# Altium PCB bookmarker.PcbDoc (part 2 of 3)
Units mil, origin at the board's own origin, x right, y up, seen from the top; angles counter-clockwise.
Board outline 5902.76 x 1187.28 mil, 2 copper layers (Top Layer, Bottom Layer); 9 components, 4 nets, 34 pads, 30 vias.
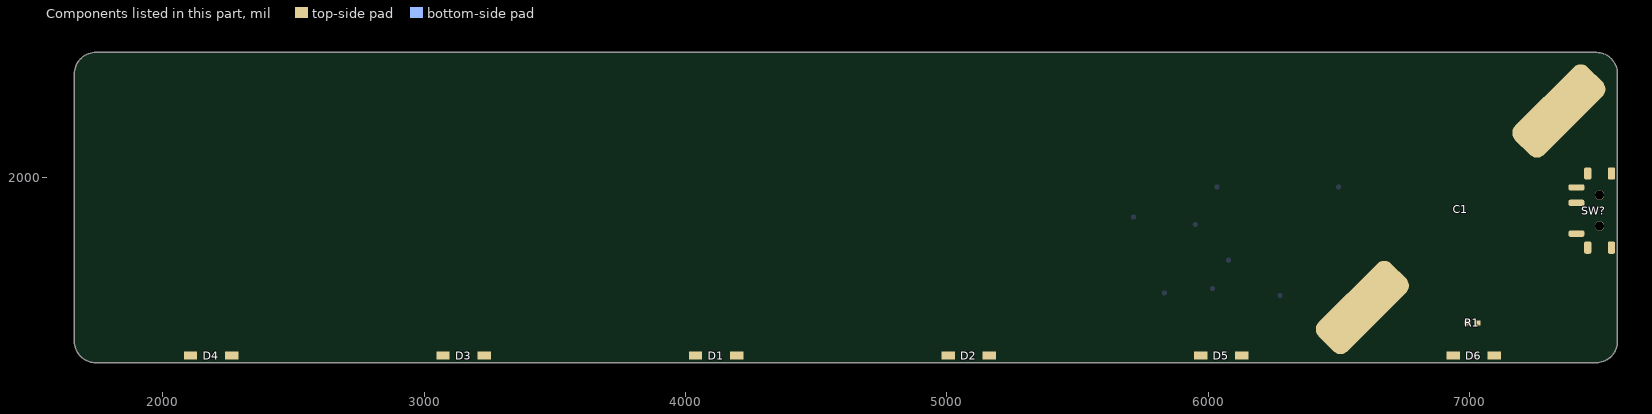
[diagram p2: the components of this part, seen from the top]

## Via types
v1: diameter 24, hole 12, Top Layer to Bottom Layer, tented both sides, 29 vias
v2: diameter 100, hole 80, Top Layer to Bottom Layer, tented both sides, 1 vias

## Nets (pads, with @x,y where several pads share a name; then routed paths per layer and width w, separated by ;. In a path a pad name is that pad's centre, name@x,y a point inside that pad or via, vN(x,y) a via of type N, cw(c..) or ccw(c..) an arc to the next point about the centre after c; other vN are vias at no path point) (continued)
copper on no net: (continued)
  Bottom Layer w5: 2121,1698 2454,1698 ; 2121,1702.5 2454,1702.5 ; 2121,1707 2454,1707 ; 2121,1711.5 2449.5,1711.5 ; 2197.5,1819.5 2238,1819.5 ; 2197.5,1824 2229,1824 ; 2197.5,1828.5 2215.5,1828.5 ; 2202,1815 2247,1815 ; 2202,1833 2206.5,1833 ; 2211,1810.5 2260.5,1810.5 ; 2220,1806 2269.5,1806 ; 2229,1801.5 2278.5,1801.5 ; 2242.5,1797 2292,1797 ; 2251.5,1792.5 2301,1792.5 ; 2260.5,1788 2310,1788 ; 2269.5,1783.5 2323.5,1783.5 ; 2283,1585.5 2301,1585.5 ; 2283,1590 2301,1590 ; 2283,1594.5 2296.5,1594.5 ; 2283,1599 2296.5,1599 ; 2283,1603.5 2296.5,1603.5 ; 2283,1608 2292,1608 ; 2283,1779 2332.5,1779 ; 2287.5,1572 2305.5,1572 ; 2287.5,1576.5 2301,1576.5 ; 2287.5,1581 2301,1581 ; 2292,1554 2310,1554 ; 2292,1558.5 2310,1558.5 ; 2292,1563 2305.5,1563 ; 2292,1567.5 2305.5,1567.5 ; 2292,1774.5 2341.5,1774.5 ; 2296.5,1536 2683.5,1536 ; 2296.5,1540.5 2683.5,1540.5 ; 2296.5,1545 2310,1545 ; 2296.5,1549.5 2310,1549.5 ; 2301,1522.5 2692.5,1522.5 ; 2301,1527 2692.5,1527 ; 2301,1531.5 2688,1531.5 ; 2305.5,1504.5 2323.5,1504.5 ; 2305.5,1509 2323.5,1509 ; 2305.5,1513.5 2319,1513.5 ; 2305.5,1518 2319,1518 ; 2305.5,1770 2355,1770 ; 2310,1491 2328,1491 ; 2310,1495.5 2323.5,1495.5 ; 2310,1500 2323.5,1500 ; 2314.5,1473 2332.5,1473 ; 2314.5,1477.5 2328,1477.5 ; 2314.5,1482 2328,1482 ; 2314.5,1486.5 2328,1486.5 ; 2314.5,1765.5 2364,1765.5 ; 2319,1459.5 2332.5,1459.5 ; 2319,1464 2332.5,1464 ; 2319,1468.5 2332.5,1468.5 ; 2323.5,1455 2332.5,1455 ; 2323.5,1585.5 2346,1585.5 ; 2323.5,1590 2346,1590 ; 2328,1581 2341.5,1581 ; 2328,1594.5 2350.5,1594.5 ; 2328,1599 2355,1599 ; 2328,1761 2373,1761 ; 2332.5,1603.5 2359.5,1603.5 ; 2337,1608 2364,1608 ; 2337,1756.5 2386.5,1756.5 ; 2341.5,1612.5 2373,1612.5 ; 2346,1617 2377.5,1617 ; 2346,1752 2395.5,1752 ; 2350.5,1621.5 2382,1621.5 ; 2355,1626 2386.5,1626 ; 2359.5,1630.5 2391,1630.5 ; 2359.5,1747.5 2404.5,1747.5 ; 2364,1635 2400,1635 ; 2368.5,1639.5 2404.5,1639.5 ; 2368.5,1743 2409,1743 ; 2377.5,1644 2409,1644 ; 2377.5,1738.5 2409,1738.5 ; 2382,1648.5 2418,1648.5 ; 2386.5,1653 2422.5,1653 ; 2391,1657.5 2431.5,1657.5 ; 2391,1734 2404.5,1734 ; 2400,1662 2440.5,1662 ; 2404.5,1666.5 2445,1666.5 ; 2413.5,1671 2454,1671 ; 2418,1675.5 2463,1675.5 ; 2427,1680 2472,1680 ; 2431.5,1684.5 2481,1684.5 ; 2440.5,1689 2490,1689 ; 2449.5,1693.5 2499,1693.5 ; 2458.5,1698 2508,1698 ; 2463,1581 2481,1581 ; 2463,1585.5 2481,1585.5 ; 2463,1590 2476.5,1590 ; 2463,1594.5 2472,1594.5 ; 2467.5,1572 2485.5,1572 ; 2467.5,1576.5 2485.5,1576.5 ; 2467.5,1702.5 2517,1702.5 ; 2472,1563 2494.5,1563 ; 2472,1567.5 2490,1567.5 ; 2476.5,1558.5 2494.5,1558.5 ; 2476.5,1707 2530.5,1707 ; 2481,1549.5 2499,1549.5 ; 2481,1554 2499,1554 ; 2485.5,1545 2503.5,1545 ; 2485.5,1711.5 2539.5,1711.5 ; 2494.5,1716 2553,1716 ; 2499,1518 2517,1518 ; 2503.5,1509 2526,1509 ; 2503.5,1513.5 2521.5,1513.5 ; 2503.5,1720.5 2584.5,1720.5 ; 2508,1504.5 2526,1504.5 ; 2508,1810.5 2530.5,1810.5 ; 2508,1815 2526,1815 ; 2508,1819.5 2526,1819.5 ; 2508,1824 2521.5,1824 ; 2512.5,1495.5 2530.5,1495.5 ; 2512.5,1500 2530.5,1500 ; 2512.5,1801.5 2535,1801.5 ; 2512.5,1806 2535,1806 ; 2517,1486.5 2539.5,1486.5 ; 2517,1491 2535,1491 ; 2517,1725 2580,1725 ; 2517,1797 2539.5,1797 ; 2521.5,1482 2539.5,1482 ; 2521.5,1788 2544,1788 ; 2521.5,1792.5 2539.5,1792.5 ; 2526,1473 2544,1473 ; 2526,1477.5 2544,1477.5 ; 2526,1729.5 2580,1729.5 ; 2526,1779 2548.5,1779 ; 2526,1783.5 2548.5,1783.5 ; 2530.5,1468.5 2544,1468.5 ; 2530.5,1774.5 2553,1774.5 ; 2535,1765.5 2557.5,1765.5 ; 2535,1770 2553,1770 ; 2539.5,1734 2575.5,1734 ; 2539.5,1756.5 2562,1756.5 ; 2539.5,1761 2557.5,1761 ; 2544,1752 2566.5,1752 ; 2548.5,1738.5 2571,1738.5 ; 2548.5,1743 2571,1743 ; 2548.5,1747.5 2566.5,1747.5 ; 2566.5,1711.5 2589,1711.5 ; 2566.5,1716 2584.5,1716 ; 2571,1702.5 2593.5,1702.5 ; 2571,1707 2589,1707 ; 2575.5,1698 2598,1698 ; 2580,1689 2602.5,1689 ; 2580,1693.5 2598,1693.5 ; 2584.5,1680 2607,1680 ; 2584.5,1684.5 2602.5,1684.5 ; 2589,1671 2611.5,1671 ; 2589,1675.5 2611.5,1675.5 ; 2589,2251.5 2607,2251.5 ; 2589,2256 2607,2256 ; 2589,2260.5 2922,2260.5 ; 2589,2265 2917.5,2265 ; 2593.5,1666.5 2616,1666.5 ; 2593.5,2242.5 2616,2242.5 ; 2593.5,2247 2611.5,2247 ; 2593.5,2269.5 2913,2269.5 ; 2593.5,2274 2913,2274 ; 2598,1657.5 2620.5,1657.5 ; 2598,1662 2616,1662 ; 2598,2233.5 2620.5,2233.5 ; 2598,2238 2616,2238 ; 2602.5,1648.5 2625,1648.5 ; 2602.5,1653 2625,1653 ; 2602.5,2224.5 2625,2224.5 ; 2602.5,2229 2625,2229 ; 2607,1644 2629.5,1644 ; 2607,2220 2629.5,2220 ; 2607,2278.5 2908.5,2278.5 ; 2611.5,1635 2634,1635 ; 2611.5,1639.5 2629.5,1639.5 ; 2611.5,1792.5 2917.5,1792.5 ; 2611.5,1797 2913,1797 ; 2611.5,1801.5 2908.5,1801.5 ; 2611.5,2211 2629.5,2211 ; 2611.5,2215.5 2629.5,2215.5 ; 2616,1626 2638.5,1626 ; 2616,1630.5 2634,1630.5 ; 2616,1788 2917.5,1788 ; 2620.5,1621.5 2638.5,1621.5 ; 2625,1612.5 2638.5,1612.5 ; 2625,1617 2638.5,1617 ; 2634,1585.5 2656.5,1585.5 ; 2634,1590 2652,1590 ; 2634,1594.5 2652,1594.5 ; 2634,1599 2647.5,1599 ; 2638.5,1576.5 2661,1576.5 ; 2638.5,1581 2656.5,1581 ; 2643,1572 2665.5,1572 ; 2643,2161.5 2665.5,2161.5 ; 2643,2166 2661,2166 ; 2643,2170.5 2661,2170.5 ; 2643,2175 2670,2175 ; 2643,2179.5 2971.5,2179.5 ; 2643,2184 2967,2184 ; 2643,2188.5 2962.5,2188.5 ; 2647.5,1563 2670,1563 ; 2647.5,1567.5 2665.5,1567.5 ; 2647.5,2152.5 2670,2152.5 ; 2647.5,2157 2665.5,2157 ; 2652,1554 2674.5,1554 ; 2652,1558.5 2670,1558.5 ; 2652,2143.5 2674.5,2143.5 ; 2652,2148 2674.5,2148 ; 2652,2193 2962.5,2193 ; 2656.5,1545 2679,1545 ; 2656.5,1549.5 2679,1549.5 ; 2656.5,1783.5 2679,1783.5 ; 2656.5,2139 2679,2139 ; 2661,1774.5 2683.5,1774.5 ; 2661,1779 2679,1779 ; 2661,2130 2679,2130 ; 2661,2134.5 2679,2134.5 ; 2665.5,1765.5 2688,1765.5 ; 2665.5,1770 2688,1770 ; 2665.5,2125.5 2679,2125.5 ; 2670,1761 2692.5,1761 ; 2674.5,1518 2697,1518 ; 2674.5,1752 2697,1752 ; 2674.5,1756.5 2692.5,1756.5 ; 2679,1509 2701.5,1509 ; 2679,1513.5 2697,1513.5 ; 2679,1743 2701.5,1743 ; 2679,1747.5 2697,1747.5 ; 2683.5,1500 2706,1500 ; 2683.5,1504.5 2701.5,1504.5 ; 2683.5,1738.5 2706,1738.5 ; 2688,1491 2710.5,1491 ; 2688,1495.5 2710.5,1495.5 ; 2688,1729.5 2710.5,1729.5 ; 2688,1734 2706,1734 ; 2692.5,1486.5 2715,1486.5 ; 2692.5,1720.5 2715,1720.5 ; 2692.5,1725 2710.5,1725 ; 2692.5,2062.5 2899.5,2062.5 ; 2692.5,2067 2895,2067 ; 2697,1477.5 2719.5,1477.5 ; 2697,1482 2715,1482 ; 2697,1711.5 2719.5,1711.5 ; 2697,1716 2719.5,1716 ; 2697,2053.5 2904,2053.5 ; 2697,2058 2904,2058 ; 2697,2071.5 2895,2071.5 ; 2701.5,1468.5 2724,1468.5 ; 2701.5,1473 2724,1473 ; 2701.5,1707 2724,1707 ; 2706,1464 2724,1464 ; 2706,1630.5 3007.5,1630.5 ; 2706,1635 3007.5,1635 ; 2706,1639.5 3007.5,1639.5 ; 2706,1644 3003,1644 ; 2706,1698 2728.5,1698 ; 2706,1702.5 2724,1702.5 ; 2706,2202 2724,2202 ; 2706,2206.5 2724,2206.5 ; 2706,2211 2728.5,2211 ; 2706,2215.5 2728.5,2215.5 ; 2710.5,1459.5 2724,1459.5 ; 2710.5,1626 3007.5,1626 ; 2710.5,1689 2733,1689 ; 2710.5,1693.5 2733,1693.5 ; 2710.5,2220 2733,2220 ; 2710.5,2224.5 2737.5,2224.5 ; 2715,1684.5 2737.5,1684.5 ; 2715,2197.5 2719.5,2197.5 ; 2715,2229 2737.5,2229 ; 2715,2233.5 2742,2233.5 ; 2719.5,1675.5 2742,1675.5 ; 2719.5,1680 2737.5,1680 ; 2719.5,2238 2742,2238 ; 2724,1666.5 2746.5,1666.5 ; 2724,1671 2742,1671 ; 2724,2242.5 2746.5,2242.5 ; 2724,2247 2746.5,2247 ; 2728.5,1662 2751,1662 ; 2728.5,2251.5 2751,2251.5 ; 2728.5,2256 2751,2256 ; 2733,1653 2755.5,1653 ; 2733,1657.5 2751,1657.5 ; 2737.5,1648.5 2755.5,1648.5 ; 2737.5,1783.5 2760,1783.5 ; 2742,1774.5 2764.5,1774.5 ; 2742,1779 2760,1779 ; 2746.5,1765.5 2769,1765.5 ; 2746.5,1770 2769,1770 ; 2751,1761 2773.5,1761 ; 2751,2116.5 2782.5,2116.5 ; 2751,2121 2769,2121 ; 2751,2125.5 2773.5,2125.5 ; 2751,2130 2773.5,2130 ; 2755.5,1752 2778,1752 ; 2755.5,1756.5 2773.5,1756.5 ; 2755.5,2112 2764.5,2112 ; 2755.5,2134.5 2778,2134.5 ; 2760,1545 2778,1545 ; 2760,1549.5 2791.5,1549.5 ; 2760,1554 2805,1554 ; 2760,1558.5 2818.5,1558.5 ; 2760,1743 2782.5,1743 ; 2760,1747.5 2778,1747.5 ; 2760,2139 2778,2139 ; 2760,2143.5 2782.5,2143.5 ; 2764.5,1738.5 2787,1738.5 ; 2764.5,2148 2782.5,2148 ; 2764.5,2152.5 2787,2152.5 ; 2769,1563 2836.5,1563 ; 2769,1729.5 2791.5,1729.5 ; 2769,1734 2787,1734 ; 2769,2103 2791.5,2103 ; 2769,2107.5 2791.5,2107.5 ; 2769,2112 2787,2112 ; 2769,2157 2791.5,2157 ; 2769,2161.5 2791.5,2161.5 ; 2773.5,1518 3084,1518 ; 2773.5,1522.5 3093,1522.5 ; 2773.5,1527 3102,1527 ; 2773.5,1720.5 2796,1720.5 ; 2773.5,1725 2791.5,1725 ; 2773.5,1936.5 2805,1936.5 ; 2773.5,1941 2827.5,1941 ; 2773.5,1945.5 2845.5,1945.5 ; 2773.5,1950 2868,1950 ; 2773.5,2098.5 2796,2098.5 ; 2773.5,2166 2796,2166 ; 2773.5,2170.5 2796,2170.5 ; 2773.5,2175 2800.5,2175 ; 2778,1513.5 3075,1513.5 ; 2778,1567.5 2859,1567.5 ; 2778,1711.5 2800.5,1711.5 ; 2778,1716 2800.5,1716 ; 2778,2089.5 2800.5,2089.5 ; 2778,2094 2796,2094 ; 2782.5,1509 3066,1509 ; 2782.5,1707 2805,1707 ; 2782.5,1954.5 2890.5,1954.5 ; 2782.5,2080.5 2805,2080.5 ; 2782.5,2085 2805,2085 ; 2782.5,2233.5 2859,2233.5 ; 2782.5,2238 2841,2238 ; 2782.5,2242.5 2818.5,2242.5 ; 2782.5,2247 2800.5,2247 ; 2787,1698 2809.5,1698 ; 2787,1702.5 2805,1702.5 ; 2787,2076 2809.5,2076 ; 2787,2229 2877,2229 ; 2791.5,1572 2886,1572 ; 2791.5,1689 2814,1689 ; 2791.5,1693.5 2814,1693.5 ; 2796,1684.5 2818.5,1684.5 ; 2800.5,1675.5 2823,1675.5 ; 2800.5,1680 2818.5,1680 ; 2805,1576.5 2931,1576.5 ; 2805,1666.5 2827.5,1666.5 ; 2805,1671 2823,1671 ; 2805,1959 2908.5,1959 ; 2805,2044.5 2827.5,2044.5 ; 2805,2049 2823,2049 ; 2809.5,1662 2832,1662 ; 2809.5,2040 2832,2040 ; 2809.5,2224.5 2886,2224.5 ; 2814,1653 2836.5,1653 ; 2814,1657.5 2832,1657.5 ; 2814,2031 2836.5,2031 ; 2814,2035.5 2832,2035.5 ; 2818.5,1648.5 2836.5,1648.5 ; 2818.5,1783.5 2841,1783.5 ; 2818.5,2022 2841,2022 ; 2818.5,2026.5 2841,2026.5 ; 2823,1581 3205.5,1581 ; 2823,1774.5 2845.5,1774.5 ; 2823,1779 2845.5,1779 ; 2823,2017.5 2845.5,2017.5 ; 2827.5,1770 2850,1770 ; 2827.5,1963.5 2931,1963.5 ; 2827.5,2008.5 2850,2008.5 ; 2827.5,2013 2845.5,2013 ; 2827.5,2220 2886,2220 ; 2832,1761 2854.5,1761 ; 2832,1765.5 2850,1765.5 ; 2832,1999.5 2850,1999.5 ; 2832,2004 2850,2004 ; 2836.5,1752 2859,1752 ; 2836.5,1756.5 2859,1756.5 ; 2836.5,1995 2850,1995 ; 2836.5,2148 2917.5,2148 ; 2836.5,2152.5 2895,2152.5 ; 2836.5,2157 2877,2157 ; 2836.5,2161.5 2859,2161.5 ; 2836.5,2166 2841,2166 ; 2841,1585.5 3205.5,1585.5 ; 2841,1747.5 2863.5,1747.5 ; 2845.5,1738.5 2868,1738.5 ; 2845.5,1743 2863.5,1743 ; 2845.5,1968 2949,1968 ; 2845.5,2143.5 2935.5,2143.5 ; 2845.5,2215.5 2886,2215.5 ; 2850,1729.5 2872.5,1729.5 ; 2850,1734 2868,1734 ; 2854.5,1725 2877,1725 ; 2854.5,2098.5 3048,2098.5 ; 2854.5,2103 3043.5,2103 ; 2854.5,2107.5 3043.5,2107.5 ; 2854.5,2112 3039,2112 ; 2859,1716 2881.5,1716 ; 2859,1720.5 2877,1720.5 ; 2859,2089.5 2881.5,2089.5 ; 2859,2094 3048,2094 ; 2863.5,1590 3205.5,1590 ; 2863.5,1707 2886,1707 ; 2863.5,1711.5 2881.5,1711.5 ; 2863.5,2085 2886,2085 ; 2863.5,2211 2886,2211 ; 2868,1698 2890.5,1698 ; 2868,1702.5 2890.5,1702.5 ; 2868,1972.5 2962.5,1972.5 ; 2868,2076 2890.5,2076 ; 2868,2080.5 2886,2080.5 ; 2868,2139 2935.5,2139 ; 2872.5,1693.5 2895,1693.5 ; 2877,1684.5 2899.5,1684.5 ; 2877,1689 2895,1689 ; 2881.5,1675.5 2904,1675.5 ; 2881.5,1680 2904,1680 ; 2886,1671 2908.5,1671 ; 2886,1977 2962.5,1977 ; 2886,2049 2908.5,2049 ; 2886,2134.5 2935.5,2134.5 ; 2890.5,1662 2913,1662 ; 2890.5,1666.5 2908.5,1666.5 ; 2890.5,2040 2913,2040 ; 2890.5,2044.5 2908.5,2044.5 ; 2895,1594.5 3205.5,1594.5 ; 2895,1653 2917.5,1653 ; 2895,1657.5 2913,1657.5 ; 2895,2031 2917.5,2031 ; 2895,2035.5 2917.5,2035.5 ; 2899.5,1648.5 2922,1648.5 ; 2899.5,1783.5 2922,1783.5 ; 2899.5,2026.5 3093,2026.5 ; 2904,1774.5 2926.5,1774.5 ; 2904,1779 2922,1779 ; 2904,2017.5 3093,2017.5 ; 2904,2022 3093,2022 ; 2904,2251.5 2926.5,2251.5 ; 2904,2256 2922,2256 ; 2908.5,1765.5 2931,1765.5 ; 2908.5,1770 2931,1770 ; 2908.5,1981.5 2962.5,1981.5 ; 2908.5,2013 3093,2013 ; 2908.5,2130 2935.5,2130 ; 2908.5,2242.5 2931,2242.5 ; 2908.5,2247 2931,2247 ; 2913,1761 2935.5,1761 ; 2913,2238 2935.5,2238 ; 2913,2287.5 2944.5,2287.5 ; 2913,2292 2940,2292 ; 2913,2296.5 2931,2296.5 ; 2917.5,1752 2940,1752 ; 2917.5,1756.5 2935.5,1756.5 ; 2917.5,2229 2940,2229 ; 2917.5,2233.5 2935.5,2233.5 ; 2917.5,2283 2953.5,2283 ; 2917.5,2301 2922,2301 ; 2922,1743 2944.5,1743 ; 2922,1747.5 2940,1747.5 ; 2922,2220 2944.5,2220 ; 2922,2224.5 2944.5,2224.5 ; 2922,2278.5 2962.5,2278.5 ; 2926.5,1738.5 2949,1738.5 ; 2926.5,2125.5 2935.5,2125.5 ; 2926.5,2215.5 2949,2215.5 ; 2931,1729.5 2953.5,1729.5 ; 2931,1734 2949,1734 ; 2931,1986 2958,1986 ; 2931,2206.5 2949,2206.5 ; 2931,2211 2949,2211 ; 2931,2274 2971.5,2274 ; 2935.5,1720.5 3138,1720.5 ; 2935.5,1725 2953.5,1725 ; 2935.5,2202 2949,2202 ; 2940,1711.5 3142.5,1711.5 ; 2940,1716 3142.5,1716 ; 2940,2269.5 2976,2269.5 ; 2944.5,1707 3147,1707 ; 2944.5,2085 2967,2085 ; 2944.5,2089.5 2962.5,2089.5 ; 2944.5,2265 2985,2265 ; 2949,1599 3201,1599 ; 2949,1698 2971.5,1698 ; 2949,1702.5 2967,1702.5 ; 2949,1990.5 2953.5,1990.5 ; 2949,2080.5 2971.5,2080.5 ; 2949,2175 2971.5,2175 ; 2953.5,1689 2976,1689 ; 2953.5,1693.5 2976,1693.5 ; 2953.5,2071.5 2976,2071.5 ; 2953.5,2076 2971.5,2076 ; 2953.5,2170.5 2976,2170.5 ; 2953.5,2260.5 2994,2260.5 ; 2958,1684.5 2980.5,1684.5 ; 2958,2062.5 2980.5,2062.5 ; 2958,2067 2980.5,2067 ; 2958,2161.5 2980.5,2161.5 ; 2958,2166 2980.5,2166 ; 2962.5,1675.5 2985,1675.5 ; 2962.5,1680 2980.5,1680 ; 2962.5,2058 2985,2058 ; 2962.5,2157 2985,2157 ; 2962.5,2256 3003,2256 ; 2967,1666.5 2989.5,1666.5 ; 2967,1671 2985,1671 ; 2967,1815 2989.5,1815 ; 2967,1819.5 2989.5,1819.5 ; 2967,1824 2985,1824 ; 2967,1828.5 2980.5,1828.5 ; 2967,2049 2989.5,2049 ; 2967,2053.5 2985,2053.5 ; 2967,2148 2989.5,2148 ; 2967,2152.5 2985,2152.5 ; 2971.5,1662 2994,1662 ; 2971.5,1810.5 2994,1810.5 ; 2971.5,2040 2994,2040 ; 2971.5,2044.5 2994,2044.5 ; 2971.5,2139 2994,2139 ; 2971.5,2143.5 2994,2143.5 ; 2971.5,2251.5 3012,2251.5 ; 2976,1653 2998.5,1653 ; 2976,1657.5 2994,1657.5 ; 2976,1801.5 2998.5,1801.5 ; 2976,1806 2994,1806 ; 2976,2035.5 2998.5,2035.5 ; 2976,2134.5 2998.5,2134.5 ; 2980.5,1459.5 2998.5,1459.5 ; 2980.5,1464 3003,1464 ; 2980.5,1468.5 3007.5,1468.5 ; 2980.5,1473 3016.5,1473 ; 2980.5,1648.5 2998.5,1648.5 ; 2980.5,1792.5 3003,1792.5 ; 2980.5,1797 2998.5,1797 ; 2980.5,2031 2998.5,2031 ; 2980.5,2125.5 2998.5,2125.5 ; 2980.5,2130 2998.5,2130 ; 2980.5,2247 3025.5,2247 ; 2985,1477.5 3021,1477.5 ; 2985,1788 3007.5,1788 ; 2985,2121 2998.5,2121 ; 2989.5,1455 2994,1455 ; 2989.5,1482 3025.5,1482 ; 2989.5,1779 3012,1779 ; 2989.5,1783.5 3007.5,1783.5 ; 2989.5,2242.5 3034.5,2242.5 ; 2994,1486.5 3030,1486.5 ; 2994,1770 3016.5,1770 ; 2994,1774.5 3012,1774.5 ; 2998.5,1491 3039,1491 ; 2998.5,1761 3021,1761 ; 2998.5,1765.5 3021,1765.5 ; 2998.5,2238 3043.5,2238 ; 3003,1756.5 3025.5,1756.5 ; 3007.5,1495.5 3043.5,1495.5 ; 3007.5,1747.5 3030,1747.5 ; 3007.5,1752 3025.5,1752 ; 3007.5,2233.5 3057,2233.5 ; 3012,1500 3052.5,1500 ; 3012,1738.5 3034.5,1738.5 ; 3012,1743 3034.5,1743 ; 3016.5,1734 3039,1734 ; 3016.5,2116.5 3034.5,2116.5 ; 3016.5,2121 3034.5,2121 ; 3016.5,2125.5 3039,2125.5 ; 3016.5,2130 3039,2130 ; 3016.5,2134.5 3043.5,2134.5 ; 3016.5,2229 3066,2229 ; 3021,1504.5 3057,1504.5 ; 3021,1725 3043.5,1725 ; 3021,1729.5 3039,1729.5 ; 3021,1972.5 3066,1972.5 ; 3021,1977 3057,1977 ; 3021,1981.5 3043.5,1981.5 ; 3021,1986 3034.5,1986 ; 3021,2139 3043.5,2139 ; 3021,2143.5 3048,2143.5 ; 3025.5,2148 3052.5,2148 ; 3030,1968 3075,1968 ; 3030,2089.5 3052.5,2089.5 ; 3030,2152.5 3057,2152.5 ; 3030,2157 3061.5,2157 ; 3030,2224.5 3079.5,2224.5 ; 3034.5,1702.5 3057,1702.5 ; 3034.5,2080.5 3057,2080.5 ; 3034.5,2085 3057,2085 ; 3034.5,2161.5 3066,2161.5 ; 3039,1693.5 3061.5,1693.5 ; 3039,1698 3057,1698 ; 3039,1963.5 3084,1963.5 ; 3039,2076 3061.5,2076 ; 3039,2166 3070.5,2166 ; 3039,2220 3093,2220 ; 3043.5,1684.5 3066,1684.5 ; 3043.5,1689 3066,1689 ; 3043.5,2067 3219,2067 ; 3043.5,2071.5 3214.5,2071.5 ; 3043.5,2170.5 3075,2170.5 ; 3048,1680 3070.5,1680 ; 3048,1959 3093,1959 ; 3048,2058 3219,2058 ; 3048,2062.5 3219,2062.5 ; 3048,2175 3079.5,2175 ; 3052.5,1671 3075,1671 ; 3052.5,1675.5 3070.5,1675.5 ; 3052.5,2053.5 3219,2053.5 ; 3052.5,2179.5 3088.5,2179.5 ; 3052.5,2215.5 3124.5,2215.5 ; 3057,1662 3079.5,1662 ; 3057,1666.5 3079.5,1666.5 ; 3057,1954.5 3102,1954.5 ; 3057,2044.5 3079.5,2044.5 ; 3057,2049 3075,2049 ; 3057,2184 3093,2184 ; 3061.5,1531.5 3111,1531.5 ; 3061.5,1657.5 3084,1657.5 ; 3061.5,2040 3084,2040 ; 3061.5,2188.5 3102,2188.5 ; 3061.5,2211 3129,2211 ; 3066,1648.5 3088.5,1648.5 ; 3066,1653 3084,1653 ; 3066,1950 3111,1950 ; 3066,2031 3088.5,2031 ; 3066,2035.5 3084,2035.5 ; 3066,2193 3111,2193 ; 3070.5,1536 3120,1536 ; 3070.5,1639.5 3093,1639.5 ; 3070.5,1644 3088.5,1644 ; 3075,1635 3097.5,1635 ; 3075,1810.5 3093,1810.5 ; 3075,1815 3093,1815 ; 3075,1945.5 3124.5,1945.5 ; 3075,2197.5 3120,2197.5 ; 3075,2206.5 3129,2206.5 ; 3079.5,1540.5 3133.5,1540.5 ; 3079.5,1626 3102,1626 ; 3079.5,1630.5 3097.5,1630.5 ; 3079.5,1801.5 3097.5,1801.5 ; 3079.5,1806 3097.5,1806 ; 3079.5,2202 3129,2202 ; 3084,1617 3106.5,1617 ; 3084,1621.5 3102,1621.5 ; 3084,1788 3106.5,1788 ; 3084,1792.5 3102,1792.5 ; 3084,1797 3102,1797 ; 3084,1941 3133.5,1941 ; 3088.5,1545 3133.5,1545 ; 3088.5,1608 3111,1608 ; 3088.5,1612.5 3111,1612.5 ; 3088.5,1779 3111,1779 ; 3088.5,1783.5 3106.5,1783.5 ; 3093,1603.5 3115.5,1603.5 ; 3093,1770 3115.5,1770 ; 3093,1774.5 3111,1774.5 ; 3093,2107.5 3115.5,2107.5 ; 3093,2112 3115.5,2112 ; 3093,2116.5 3111,2116.5 ; 3093,2121 3106.5,2121 ; 3097.5,1549.5 3133.5,1549.5 ; 3097.5,1761 3120,1761 ; 3097.5,1765.5 3115.5,1765.5 ; 3097.5,1936.5 3133.5,1936.5 ; 3097.5,2103 3120,2103 ; 3102,1752 3124.5,1752 ; 3102,1756.5 3120,1756.5 ; 3102,2094 3124.5,2094 ; 3102,2098.5 3120,2098.5 ; 3106.5,1554 3133.5,1554 ; 3106.5,1743 3129,1743 ; 3106.5,1747.5 3124.5,1747.5 ; 3106.5,1932 3133.5,1932 ; 3106.5,2089.5 3129,2089.5 ; 3111,1734 3133.5,1734 ; 3111,1738.5 3129,1738.5 ; 3111,2080.5 3133.5,2080.5 ; 3111,2085 3129,2085 ; 3115.5,1725 3138,1725 ; 3115.5,1729.5 3133.5,1729.5 ; 3115.5,1927.5 3133.5,1927.5 ; 3115.5,2076 3138,2076 ; 3115.5,2220 3120,2220 ; 3120,1558.5 3129,1558.5 ; 3120,2251.5 3327,2251.5 ; 3120,2256 3327,2256 ; 3120,2260.5 3322.5,2260.5 ; 3124.5,1923 3129,1923 ; 3124.5,2247 3331.5,2247 ; 3129,1698 3151.5,1698 ; 3129,1702.5 3147,1702.5 ; 3129,2049 3151.5,2049 ; 3133.5,1689 3156,1689 ; 3133.5,1693.5 3151.5,1693.5 ; 3133.5,2044.5 3156,2044.5 ; 3138,1680 3160.5,1680 ; 3138,1684.5 3156,1684.5 ; 3138,2035.5 3160.5,2035.5 ; 3138,2040 3156,2040 ; 3142.5,1671 3165,1671 ; 3142.5,1675.5 3160.5,1675.5 ; 3142.5,2031 3165,2031 ; 3147,1662 3169.5,1662 ; 3147,1666.5 3165,1666.5 ; 3147,2022 3169.5,2022 ; 3147,2026.5 3165,2026.5 ; 3151.5,1653 3174,1653 ; 3151.5,1657.5 3169.5,1657.5 ; 3151.5,2013 3174,2013 ; 3151.5,2017.5 3174,2017.5 ; 3156,1644 3178.5,1644 ; 3156,1648.5 3174,1648.5 ; 3156,1986 3192,1986 ; 3156,1990.5 3183,1990.5 ; 3156,1995 3174,1995 ; 3156,2008.5 3174,2008.5 ; 3160.5,1639.5 3183,1639.5 ; 3160.5,1824 3178.5,1824 ; 3160.5,1828.5 3178.5,1828.5 ; 3160.5,1981.5 3201,1981.5 ; 3160.5,1999.5 3174,1999.5 ; 3160.5,2004 3174,2004 ; 3165,1468.5 3183,1468.5 ; 3165,1473 3187.5,1473 ; 3165,1477.5 3192,1477.5 ; 3165,1482 3192,1482 ; 3165,1630.5 3187.5,1630.5 ; 3165,1635 3183,1635 ; 3165,1815 3183,1815 ; 3165,1819.5 3183,1819.5 ; 3165,1833 3174,1833 ; 3169.5,1464 3178.5,1464 ; 3169.5,1486.5 3196.5,1486.5 ; 3169.5,1621.5 3192,1621.5 ; 3169.5,1626 3187.5,1626 ; 3169.5,1806 3192,1806 ; 3169.5,1810.5 3187.5,1810.5 ; 3169.5,1977 3210,1977 ; 3169.5,2238 3192,2238 ; 3169.5,2242.5 3192,2242.5 ; 3174,1491 3201,1491 ; 3174,1612.5 3196.5,1612.5 ; 3174,1617 3192,1617 ; 3174,1801.5 3192,1801.5 ; 3174,2233.5 3196.5,2233.5 ; 3178.5,1495.5 3205.5,1495.5 ; 3178.5,1603.5 3201,1603.5 ; 3178.5,1608 3196.5,1608 ; 3178.5,1792.5 3196.5,1792.5 ; 3178.5,1797 3196.5,1797 ; 3178.5,1972.5 3219,1972.5 ; 3178.5,2224.5 3201,2224.5 ; 3178.5,2229 3196.5,2229 ; 3183,1500 3210,1500 ; 3183,1783.5 3205.5,1783.5 ; 3183,1788 3201,1788 ; 3183,2220 3205.5,2220 ; 3187.5,1504.5 3219,1504.5 ; 3187.5,1774.5 3210,1774.5 ; 3187.5,1779 3205.5,1779 ; 3187.5,1968 3228,1968 ; 3187.5,2211 3210,2211 ; 3187.5,2215.5 3205.5,2215.5 ; 3192,1509 3223.5,1509 ; 3192,1770 3210,1770 ; 3192,2202 3214.5,2202 ; 3192,2206.5 3214.5,2206.5 ; 3196.5,1513.5 3228,1513.5 ; 3196.5,1761 3214.5,1761 ; 3196.5,1765.5 3214.5,1765.5 ; 3196.5,1963.5 3241.5,1963.5 ; 3196.5,2197.5 3219,2197.5 ; 3201,1518 3232.5,1518 ; 3201,1752 3223.5,1752 ; 3201,1756.5 3219,1756.5 ; 3201,2188.5 3223.5,2188.5 ; 3201,2193 3219,2193 ; 3205.5,1522.5 3241.5,1522.5 ; 3205.5,1747.5 3223.5,1747.5 ; 3205.5,1959 3250.5,1959 ; 3205.5,2179.5 3228,2179.5 ; 3205.5,2184 3228,2184 ; 3210,1527 3246,1527 ; 3210,1738.5 3228,1738.5 ; 3210,1743 3228,1743 ; 3210,2175 3232.5,2175 ; 3214.5,1531.5 3255,1531.5 ; 3214.5,1729.5 3237,1729.5 ; 3214.5,1734 3232.5,1734 ; 3214.5,1954.5 3259.5,1954.5 ; 3214.5,2166 3237,2166 ; 3214.5,2170.5 3232.5,2170.5 ; 3219,1725 3237,1725 ; 3219,2161.5 3241.5,2161.5 ; 3223.5,1536 3264,1536 ; 3223.5,1716 3241.5,1716 ; 3223.5,1720.5 3241.5,1720.5 ; 3223.5,1950 3268.5,1950 ; 3223.5,2152.5 3246,2152.5 ; 3223.5,2157 3241.5,2157 ; 3228,1540.5 3273,1540.5 ; 3228,1707 3246,1707 ; 3228,1711.5 3246,1711.5 ; 3228,2143.5 3250.5,2143.5 ; 3228,2148 3250.5,2148 ; 3232.5,1545 3277.5,1545 ; 3232.5,1698 3255,1698 ; 3232.5,1702.5 3250.5,1702.5 ; 3232.5,1945.5 3268.5,1945.5 ; 3232.5,2139 3255,2139 ; 3237,1693.5 3255,1693.5 ; 3237,2062.5 3444,2062.5 ; 3237,2067 3439.5,2067 ; 3237,2071.5 3439.5,2071.5 ; 3237,2130 3259.5,2130 ; 3237,2134.5 3255,2134.5 ; 3241.5,1549.5 3277.5,1549.5 ; 3241.5,1684.5 3259.5,1684.5 ; 3241.5,1689 3259.5,1689 ; 3241.5,1941 3268.5,1941 ; 3241.5,2058 3444,2058 ; 3241.5,2121 3264,2121 ; 3241.5,2125.5 3264,2125.5 ; 3246,1675.5 3268.5,1675.5 ; 3246,1680 3264,1680 ; 3246,2053.5 3439.5,2053.5 ; 3246,2116.5 3268.5,2116.5 ; 3250.5,1554 3277.5,1554 ; 3250.5,1671 3268.5,1671 ; 3250.5,1936.5 3268.5,1936.5 ; 3250.5,2107.5 3273,2107.5 ; 3250.5,2112 3268.5,2112 ; 3255,1558.5 3273,1558.5 ; 3255,1662 3273,1662 ; 3255,1666.5 3273,1666.5 ; 3255,2098.5 3277.5,2098.5 ; 3255,2103 3277.5,2103 ; 3259.5,1653 3282,1653 ; 3259.5,1657.5 3277.5,1657.5 ; 3259.5,1783.5 3538.5,1783.5 ; 3259.5,1788 3534,1788 ; 3259.5,1792.5 3529.5,1792.5 ; 3259.5,1932 3264,1932 ; 3259.5,2094 3282,2094 ; 3264,1648.5 3282,1648.5 ; 3264,1774.5 3286.5,1774.5 ; 3264,1779 3538.5,1779 ; 3264,2085 3286.5,2085 ; 3264,2089.5 3282,2089.5 ; 3268.5,1639.5 3286.5,1639.5 ; 3268.5,1644 3286.5,1644 ; 3268.5,1770 3291,1770 ; 3268.5,2080.5 3291,2080.5 ; 3273,1630.5 3295.5,1630.5 ; 3273,1635 3291,1635 ; 3273,1761 3295.5,1761 ; 3273,1765.5 3291,1765.5 ; 3273,2076 3291,2076 ; 3277.5,1621.5 3300,1621.5 ; 3277.5,1626 3295.5,1626 ; 3277.5,1752 3300,1752 ; 3277.5,1756.5 3300,1756.5 ; 3282,1617 3304.5,1617 ; 3282,1747.5 3304.5,1747.5 ; 3286.5,1608 3309,1608 ; 3286.5,1612.5 3304.5,1612.5 ; 3286.5,1738.5 3309,1738.5 ; 3286.5,1743 3304.5,1743 ; 3291,1603.5 3313.5,1603.5 ; 3291,1729.5 3313.5,1729.5 ; 3291,1734 3309,1734 ; 3295.5,1599 3318,1599 ; 3295.5,1725 3318,1725 ; 3300,1590 3327,1590 ; 3300,1594.5 3322.5,1594.5 ; 3300,1716 3322.5,1716 ; 3300,1720.5 3318,1720.5 ; 3304.5,1585.5 3331.5,1585.5 ; 3304.5,1707 3327,1707 ; 3304.5,1711.5 3322.5,1711.5 ; 3309,1581 3336,1581 ; 3309,1698 3331.5,1698 ; 3309,1702.5 3331.5,1702.5 ; 3309,1950 3367.5,1950 ; 3309,1954.5 3385.5,1954.5 ; 3313.5,1576.5 3340.5,1576.5 ; 3313.5,1693.5 3336,1693.5 ; 3313.5,1941 3331.5,1941 ; 3313.5,1945.5 3349.5,1945.5 ; 3313.5,1959 3399,1959 ; 3313.5,2238 3336,2238 ; 3313.5,2242.5 3331.5,2242.5 ; 3318,1572 3345,1572 ; 3318,1684.5 3340.5,1684.5 ; 3318,1689 3336,1689 ; 3318,2229 3340.5,2229 ; 3318,2233.5 3340.5,2233.5 ; 3322.5,1567.5 3349.5,1567.5 ; 3322.5,1675.5 3345,1675.5 ; 3322.5,1680 3345,1680 ; 3322.5,2224.5 3345,2224.5 ; 3327,1563 3358.5,1563 ; 3327,1671 3349.5,1671 ; 3327,2215.5 3349.5,2215.5 ; 3327,2220 3345,2220 ; 3331.5,1558.5 3363,1558.5 ; 3331.5,1662 3354,1662 ; 3331.5,1666.5 3349.5,1666.5 ; 3331.5,1963.5 3417,1963.5 ; 3331.5,2211 3354,2211 ; 3336,1653 3358.5,1653 ; 3336,1657.5 3354,1657.5 ; 3336,2202 3358.5,2202 ; 3336,2206.5 3354,2206.5 ; 3340.5,1554 3372,1554 ; 3340.5,1648.5 3363,1648.5 ; 3340.5,2193 3363,2193 ; 3340.5,2197.5 3363,2197.5 ; 3345,1549.5 3376.5,1549.5 ; 3345,1639.5 3367.5,1639.5 ; 3345,1644 3363,1644 ; 3345,2188.5 3367.5,2188.5 ; 3349.5,1545 3385.5,1545 ; 3349.5,1630.5 3372,1630.5 ; 3349.5,1635 3367.5,1635 ; 3349.5,1770 3372,1770 ; 3349.5,1774.5 3372,1774.5 ; 3349.5,1968 3435,1968 ; 3349.5,2179.5 3372,2179.5 ; 3349.5,2184 3367.5,2184 ; 3354,1621.5 3376.5,1621.5 ; 3354,1626 3376.5,1626 ; 3354,1761 3376.5,1761 ; 3354,1765.5 3376.5,1765.5 ; 3354,2170.5 3376.5,2170.5 ; 3354,2175 3376.5,2175 ; 3358.5,1540.5 3394.5,1540.5 ; 3358.5,1617 3381,1617 ; 3358.5,1756.5 3381,1756.5 ; 3358.5,2166 3381,2166 ; 3363,1536 3403.5,1536 ; 3363,1608 3385.5,1608 ; 3363,1612.5 3381,1612.5 ; 3363,1747.5 3385.5,1747.5 ; 3363,1752 3381,1752 ; 3363,2157 3385.5,2157 ; 3363,2161.5 3381,2161.5 ; 3367.5,1459.5 3381,1459.5 ; 3367.5,1464 3385.5,1464 ; 3367.5,1468.5 3390,1468.5 ; 3367.5,1473 3399,1473 ; 3367.5,1599 3646.5,1599 ; 3367.5,1603.5 3642,1603.5 ; 3367.5,1738.5 3390,1738.5 ; 3367.5,1743 3390,1743 ; 3367.5,1972.5 3453,1972.5 ; 3367.5,2148 3390,2148 ; 3367.5,2152.5 3390,2152.5 ; 3372,1477.5 3403.5,1477.5 ; 3372,1531.5 3417,1531.5 ; 3372,1594.5 3646.5,1594.5 ; 3372,1734 3394.5,1734 ; 3372,2143.5 3394.5,2143.5 ; 3376.5,1482 3408,1482 ; 3376.5,1590 3646.5,1590 ; 3376.5,1725 3399,1725 ; 3376.5,1729.5 3394.5,1729.5 ; 3376.5,2134.5 3399,2134.5 ; 3376.5,2139 3394.5,2139 ; 3376.5,2287.5 3399,2287.5 ; 3376.5,2292 3394.5,2292 ; 3376.5,2296.5 3394.5,2296.5 ; 3381,1486.5 3412.5,1486.5 ; 3381,1527 3633,1527 ; 3381,1585.5 3642,1585.5 ; 3381,1716 3403.5,1716 ; 3381,1720.5 3399,1720.5 ; 3381,1977 3471,1977 ; 3381,2130 3403.5,2130 ; 3381,2278.5 3403.5,2278.5 ; 3381,2283 3403.5,2283 ; 3381,2301 3390,2301 ; 3385.5,1491 3417,1491 ; 3385.5,1711.5 3408,1711.5 ; 3385.5,2121 3408,2121 ; 3385.5,2125.5 3403.5,2125.5 ; 3385.5,2274 3408,2274 ; 3390,1495.5 3421.5,1495.5 ; 3390,1522.5 3637.5,1522.5 ; 3390,1702.5 3412.5,1702.5 ; 3390,1707 3408,1707 ; 3390,2112 3412.5,2112 ; 3390,2116.5 3412.5,2116.5 ; 3390,2265 3412.5,2265 ; 3390,2269.5 3408,2269.5 ; 3394.5,1500 3426,1500 ; 3394.5,1693.5 3417,1693.5 ; 3394.5,1698 3412.5,1698 ; 3394.5,2107.5 3417,2107.5 ; 3394.5,2260.5 3417,2260.5 ; 3399,1504.5 3430.5,1504.5 ; 3399,1518 3642,1518 ; 3399,1684.5 3421.5,1684.5 ; 3399,1689 3421.5,1689 ; 3399,1981.5 3484.5,1981.5 ; 3399,2098.5 3421.5,2098.5 ; 3399,2103 3417,2103 ; 3399,2251.5 3421.5,2251.5 ; 3399,2256 3417,2256 ; 3403.5,1509 3646.5,1509 ; 3403.5,1513.5 3642,1513.5 ; 3403.5,1680 3426,1680 ; 3403.5,2089.5 3426,2089.5 ; 3403.5,2094 3426,2094 ; 3403.5,2242.5 3426,2242.5 ; 3403.5,2247 3426,2247 ; 3408,1671 3430.5,1671 ; 3408,1675.5 3426,1675.5 ; 3408,2085 3430.5,2085 ; 3408,2238 3430.5,2238 ; 3412.5,1662 3435,1662 ; 3412.5,1666.5 3435,1666.5 ; 3412.5,2076 3435,2076 ; 3412.5,2080.5 3430.5,2080.5 ; 3412.5,2229 3435,2229 ; 3412.5,2233.5 3430.5,2233.5 ; 3417,1657.5 3439.5,1657.5 ; 3417,1986 3493.5,1986 ; 3417,2220 3439.5,2220 ; 3417,2224.5 3439.5,2224.5 ; 3421.5,1648.5 3444,1648.5 ; 3421.5,1653 3439.5,1653 ; 3421.5,2215.5 3444,2215.5 ; 3426,1639.5 3448.5,1639.5 ; 3426,1644 3444,1644 ; 3426,2206.5 3448.5,2206.5 ; 3426,2211 3444,2211 ; 3430.5,1635 3453,1635 ; 3430.5,2197.5 3453,2197.5 ; 3430.5,2202 3453,2202 ; 3435,1626 3457.5,1626 ; 3435,1630.5 3453,1630.5 ; 3435,1770 3457.5,1770 ; 3435,1774.5 3457.5,1774.5 ; 3435,1990.5 3493.5,1990.5 ; 3435,2193 3457.5,2193 ; 3439.5,1617 3462,1617 ; 3439.5,1621.5 3457.5,1621.5 ; 3439.5,1761 3462,1761 ; 3439.5,1765.5 3462,1765.5 ; 3439.5,2184 3462,2184 ; 3439.5,2188.5 3457.5,2188.5 ; 3444,1608 3466.5,1608 ; 3444,1612.5 3466.5,1612.5 ; 3444,1756.5 3466.5,1756.5 ; 3444,2179.5 3466.5,2179.5 ; 3448.5,1747.5 3471,1747.5 ; 3448.5,1752 3466.5,1752 ; 3448.5,2170.5 3700.5,2170.5 ; 3448.5,2175 3696,2175 ; 3453,1738.5 3475.5,1738.5 ; 3453,1743 3475.5,1743 ; 3453,1995 3489,1995 ; 3453,2161.5 3700.5,2161.5 ; 3453,2166 3700.5,2166 ; 3457.5,1734 3480,1734 ; 3457.5,2157 3480,2157 ; 3462,1725 3484.5,1725 ; 3462,1729.5 3480,1729.5 ; 3462,2148 3484.5,2148 ; 3462,2152.5 3480,2152.5 ; 3466.5,1716 3489,1716 ; 3466.5,1720.5 3484.5,1720.5 ; 3466.5,1999.5 3489,1999.5 ; 3466.5,2139 3489,2139 ; 3466.5,2143.5 3489,2143.5 ; 3471,1711.5 3493.5,1711.5 ; 3471,2134.5 3493.5,2134.5 ; 3475.5,1702.5 3498,1702.5 ; 3475.5,1707 3493.5,1707 ; 3475.5,2125.5 3498,2125.5 ; 3475.5,2130 3493.5,2130 ; 3480,1693.5 3502.5,1693.5 ; 3480,1698 3498,1698 ; 3480,2121 3502.5,2121 ; 3484.5,1684.5 3507,1684.5 ; 3484.5,1689 3507,1689 ; 3484.5,2112 3507,2112 ; 3484.5,2116.5 3502.5,2116.5 ; 3489,1680 3511.5,1680 ; 3489,2103 3511.5,2103 ; 3489,2107.5 3511.5,2107.5 ; 3493.5,1671 3516,1671 ; 3493.5,1675.5 3511.5,1675.5 ; 3493.5,2098.5 3516,2098.5 ; 3498,1662 3520.5,1662 ; 3498,1666.5 3520.5,1666.5 ; 3498,2089.5 3520.5,2089.5 ; 3498,2094 3516,2094 ; 3502.5,1657.5 3525,1657.5 ; 3502.5,2080.5 3525,2080.5 ; 3502.5,2085 3525,2085 ; 3507,1648.5 3529.5,1648.5 ; 3507,1653 3525,1653 ; 3507,2076 3529.5,2076 ; 3511.5,1639.5 3534,1639.5 ; 3511.5,1644 3529.5,1644 ; 3511.5,2067 3534,2067 ; 3511.5,2071.5 3529.5,2071.5 ; 3516,1635 3538.5,1635 ; 3516,2058 3538.5,2058 ; 3516,2062.5 3538.5,2062.5 ; 3516,2265 3538.5,2265 ; 3516,2269.5 3534,2269.5 ; 3516,2274 3534,2274 ; 3516,2278.5 3529.5,2278.5 ; 3520.5,1626 3543,1626 ; 3520.5,1630.5 3538.5,1630.5 ; 3520.5,1774.5 3543,1774.5 ; 3520.5,2053.5 3543,2053.5 ; 3520.5,2260.5 3543,2260.5 ; 3525,1617 3547.5,1617 ; 3525,1621.5 3543,1621.5 ; 3525,1765.5 3547.5,1765.5 ; 3525,1770 3543,1770 ; 3525,2044.5 3547.5,2044.5 ; 3525,2049 3543,2049 ; 3525,2251.5 3547.5,2251.5 ; 3525,2256 3543,2256 ; 3529.5,1608 3552,1608 ; 3529.5,1612.5 3552,1612.5 ; 3529.5,1756.5 3552,1756.5 ; 3529.5,1761 3547.5,1761 ; 3529.5,2040 3552,2040 ; 3529.5,2242.5 3552,2242.5 ; 3529.5,2247 3552,2247 ; 3534,1752 3556.5,1752 ; 3534,2031 3556.5,2031 ; 3534,2035.5 3552,2035.5 ; 3534,2238 3556.5,2238 ; 3538.5,1743 3561,1743 ; 3538.5,1747.5 3556.5,1747.5 ; 3538.5,2022 3561,2022 ; 3538.5,2026.5 3556.5,2026.5 ; 3538.5,2229 3561,2229 ; 3538.5,2233.5 3556.5,2233.5 ; 3543,1734 3565.5,1734 ; 3543,1738.5 3561,1738.5 ; 3543,2017.5 3561,2017.5 ; 3543,2220 3565.5,2220 ; 3543,2224.5 3565.5,2224.5 ; 3547.5,1725 3570,1725 ; 3547.5,1729.5 3570,1729.5 ; 3547.5,2215.5 3570,2215.5 ; 3552,1720.5 3574.5,1720.5 ; 3552,1995 3583.5,1995 ; 3552,1999.5 3574.5,1999.5 ; 3552,2206.5 3574.5,2206.5 ; 3552,2211 3570,2211 ; 3556.5,1711.5 3579,1711.5 ; 3556.5,1716 3574.5,1716 ; 3556.5,1990.5 3588,1990.5 ; 3556.5,2004 3565.5,2004 ; 3556.5,2197.5 3579,2197.5 ; 3556.5,2202 3579,2202 ; 3561,1702.5 3583.5,1702.5 ; 3561,1707 3579,1707 ; 3561,1986 3597,1986 ; 3561,2193 3583.5,2193 ; 3565.5,1698 3588,1698 ; 3565.5,1981.5 3606,1981.5 ; 3565.5,2184 3588,2184 ; 3565.5,2188.5 3583.5,2188.5 ; 3570,1689 3592.5,1689 ; 3570,1693.5 3588,1693.5 ; 3570,1819.5 3592.5,1819.5 ; 3570,1824 3588,1824 ; 3570,2179.5 3592.5,2179.5 ; 3574.5,1680 3597,1680 ; 3574.5,1684.5 3592.5,1684.5 ; 3574.5,1810.5 3597,1810.5 ; 3574.5,1815 3592.5,1815 ; 3574.5,1977 3615,1977 ; 3574.5,2040 3606,2040 ; 3574.5,2044.5 3615,2044.5 ; 3574.5,2049 3624,2049 ; 3579,1671 3678,1671 ; 3579,1675.5 3673.5,1675.5 ; 3579,1801.5 3601.5,1801.5 ; 3579,1806 3597,1806 ; 3579,2035.5 3597,2035.5 ; 3583.5,1666.5 3637.5,1666.5 ; 3583.5,1792.5 3606,1792.5 ; 3583.5,1797 3601.5,1797 ; 3583.5,1972.5 3624,1972.5 ; 3583.5,2031 3588,2031 ; 3583.5,2053.5 3633,2053.5 ; 3583.5,2157 3606,2157 ; 3588,1657.5 3610.5,1657.5 ; 3588,1662 3619.5,1662 ; 3588,1788 3610.5,1788 ; 3588,2058 3646.5,2058 ; 3588,2148 3610.5,2148 ; 3588,2152.5 3606,2152.5 ; 3592.5,1648.5 3615,1648.5 ; 3592.5,1653 3615,1653 ; 3592.5,1779 3615,1779 ; 3592.5,1783.5 3610.5,1783.5 ; 3592.5,1968 3633,1968 ; 3592.5,2139 3615,2139 ; 3592.5,2143.5 3615,2143.5 ; 3597,1644 3619.5,1644 ; 3597,1770 3619.5,1770 ; 3597,1774.5 3615,1774.5 ; 3597,2062.5 3655.5,2062.5 ; 3597,2134.5 3619.5,2134.5 ; 3601.5,1635 3624,1635 ; 3601.5,1639.5 3619.5,1639.5 ; 3601.5,1761 3624,1761 ; 3601.5,1765.5 3624,1765.5 ; 3601.5,1963.5 3637.5,1963.5 ; 3601.5,2125.5 3624,2125.5 ; 3601.5,2130 3619.5,2130 ; 3606,1626 3628.5,1626 ; 3606,1630.5 3624,1630.5 ; 3606,1680 3673.5,1680 ; 3606,1756.5 3628.5,1756.5 ; 3606,2121 3628.5,2121 ; 3610.5,1621.5 3633,1621.5 ; 3610.5,1747.5 3633,1747.5 ; 3610.5,1752 3628.5,1752 ; 3610.5,1959 3646.5,1959 ; 3610.5,2067 3669,2067 ; 3610.5,2112 3633,2112 ; 3610.5,2116.5 3628.5,2116.5 ; 3615,1612.5 3637.5,1612.5 ; 3615,1617 3633,1617 ; 3615,1738.5 3637.5,1738.5 ; 3615,1743 3637.5,1743 ; 3615,1954.5 3655.5,1954.5 ; 3615,2103 3637.5,2103 ; 3615,2107.5 3637.5,2107.5 ; 3619.5,1608 3637.5,1608 ; 3619.5,1684.5 3669,1684.5 ; 3619.5,1734 3669,1734 ; 3619.5,2071.5 3682.5,2071.5 ; 3619.5,2098.5 3642,2098.5 ; 3624,1725 3660,1725 ; 3624,1729.5 3664.5,1729.5 ; 3624,1950 3664.5,1950 ; 3624,2089.5 3646.5,2089.5 ; 3624,2094 3642,2094 ; 3628.5,1500 3651,1500 ; 3628.5,1504.5 3646.5,1504.5 ; 3628.5,1716 3655.5,1716 ; 3628.5,1720.5 3655.5,1720.5 ; 3628.5,2080.5 3709.5,2080.5 ; 3628.5,2085 3651,2085 ; 3633,1491 3655.5,1491 ; 3633,1495.5 3655.5,1495.5 ; 3633,1711.5 3655.5,1711.5 ; 3633,1945.5 3673.5,1945.5 ; 3633,2076 3696,2076 ; 3637.5,1486.5 3660,1486.5 ; 3637.5,1689 3669,1689 ; 3637.5,1702.5 3660,1702.5 ; 3637.5,1707 3655.5,1707 ; 3642,1477.5 3664.5,1477.5 ; 3642,1482 3660,1482 ; 3642,1693.5 3664.5,1693.5 ; 3642,1698 3660,1698 ; 3642,1941 3678,1941 ; 3646.5,1468.5 3669,1468.5 ; 3646.5,1473 3669,1473 ; 3646.5,1738.5 3673.5,1738.5 ; 3651,1464 3669,1464 ; 3651,1743 3678,1743 ; 3651,1936.5 3682.5,1936.5 ; 3655.5,1459.5 3669,1459.5 ; 3655.5,1747.5 3682.5,1747.5 ; 3655.5,1752 3687,1752 ; 3655.5,1932 3682.5,1932 ; 3655.5,2085 3718.5,2085 ; 3660,1662 3682.5,1662 ; 3660,1666.5 3682.5,1666.5 ; 3660,1756.5 3691.5,1756.5 ; 3664.5,1657.5 3687,1657.5 ; 3664.5,1761 3696,1761 ; 3664.5,1927.5 3678,1927.5 ; 3669,1648.5 3727.5,1648.5 ; 3669,1653 3687,1653 ; 3669,1765.5 3696,1765.5 ; 3669,2089.5 3718.5,2089.5 ; 3669,2247 3984,2247 ; 3669,2251.5 3979.5,2251.5 ; 3673.5,1639.5 3696,1639.5 ; 3673.5,1644 3736.5,1644 ; 3673.5,1770 3696,1770 ; 3673.5,2238 3988.5,2238 ; 3673.5,2242.5 3988.5,2242.5 ; 3678,1635 3700.5,1635 ; 3678,1774.5 3691.5,1774.5 ; 3678,2008.5 3718.5,2008.5 ; 3678,2013 3709.5,2013 ; 3678,2017.5 3700.5,2017.5 ; 3682.5,1626 3705,1626 ; 3682.5,1630.5 3700.5,1630.5 ; 3682.5,2022 3691.5,2022 ; 3682.5,2094 3718.5,2094 ; 3687,1617 3709.5,1617 ; 3687,1621.5 3705,1621.5 ; 3687,2004 3723,2004 ; 3691.5,1608 3714,1608 ; 3691.5,1612.5 3714,1612.5 ; 3691.5,1653 3718.5,1653 ; 3691.5,1657.5 3709.5,1657.5 ; 3691.5,1815 3723,1815 ; 3691.5,1819.5 3714,1819.5 ; 3691.5,1999.5 3732,1999.5 ; 3696,1603.5 3718.5,1603.5 ; 3696,1662 3700.5,1662 ; 3696,1810.5 3727.5,1810.5 ; 3696,1824 3709.5,1824 ; 3696,2098.5 3714,2098.5 ; 3700.5,1594.5 3723,1594.5 ; 3700.5,1599 3718.5,1599 ; 3700.5,1806 3732,1806 ; 3700.5,1828.5 3705,1828.5 ; 3700.5,1995 3741,1995 ; 3705,1585.5 3727.5,1585.5 ; 3705,1590 3727.5,1590 ; 3705,1639.5 3750,1639.5 ; 3705,1801.5 3736.5,1801.5 ; 3709.5,1581 3732,1581 ; 3709.5,1990.5 3750,1990.5 ; 3714,1527 3763.5,1527 ; 3714,1531.5 3750,1531.5 ; 3714,1536 3736.5,1536 ; 3714,1540.5 3727.5,1540.5 ; 3714,1572 3736.5,1572 ; 3714,1576.5 3732,1576.5 ; 3714,1635 3759,1635 ; 3714,1797 3745.5,1797 ; 3718.5,1522.5 3777,1522.5 ; 3718.5,1563 3741,1563 ; 3718.5,1567.5 3736.5,1567.5 ; 3718.5,1792.5 3750,1792.5 ; 3718.5,1986 3759,1986 ; 3718.5,2233.5 3741,2233.5 ; 3723,1558.5 3741,1558.5 ; 3723,1630.5 3768,1630.5 ; 3723,1788 3754.5,1788 ; 3723,2224.5 3745.5,2224.5 ; 3723,2229 3741,2229 ; 3727.5,1554 3741,1554 ; 3727.5,1783.5 3763.5,1783.5 ; 3727.5,1981.5 3763.5,1981.5 ; 3727.5,2220 3750,2220 ; 3732,1518 3786,1518 ; 3732,1626 3777,1626 ; 3732,1977 3772.5,1977 ; 3732,2211 3754.5,2211 ; 3732,2215.5 3750,2215.5 ; 3736.5,1779 3768,1779 ; 3736.5,2202 3759,2202 ; 3736.5,2206.5 3759,2206.5 ; 3741,1621.5 3786,1621.5 ; 3741,1774.5 3777,1774.5 ; 3741,1972.5 3781.5,1972.5 ; 3741,2197.5 3763.5,2197.5 ; 3745.5,1513.5 3799.5,1513.5 ; 3745.5,1770 3781.5,1770 ; 3745.5,2188.5 3768,2188.5 ; 3745.5,2193 3763.5,2193 ; 3750,1617 3786,1617 ; 3750,1968 3790.5,1968 ; 3750,2179.5 3772.5,2179.5 ; 3750,2184 3772.5,2184 ; 3754.5,1509 3813,1509 ; 3754.5,1765.5 3790.5,1765.5 ; 3754.5,2175 3777,2175 ; 3759,1612.5 3786,1612.5 ; 3759,1761 3795,1761 ; 3759,1963.5 3795,1963.5 ; 3759,2166 3781.5,2166 ; 3759,2170.5 3777,2170.5 ; 3763.5,1959 3804,1959 ; 3763.5,2161.5 3786,2161.5 ; 3768,1504.5 3822,1504.5 ; 3768,1608 3786,1608 ; 3768,1756.5 3804,1756.5 ; 3768,2152.5 3790.5,2152.5 ; 3768,2157 3786,2157 ; 3772.5,1752 3808.5,1752 ; 3772.5,1954.5 3808.5,1954.5 ; 3772.5,2143.5 3795,2143.5 ; 3772.5,2148 3795,2148 ; 3777,2139 3799.5,2139 ; 3781.5,1500 3835.5,1500 ; 3781.5,1747.5 3817.5,1747.5 ; 3781.5,1950 3808.5,1950 ; 3781.5,2130 3804,2130 ; 3781.5,2134.5 3799.5,2134.5 ; 3786,1743 3822,1743 ; 3786,2121 4137,2121 ; 3786,2125.5 3808.5,2125.5 ; 3790.5,1495.5 3844.5,1495.5 ; 3790.5,1945.5 3804,1945.5 ; 3790.5,2116.5 4141.5,2116.5 ; 3795,1738.5 3831,1738.5 ; 3795,2107.5 4146,2107.5 ; 3795,2112 4146,2112 ; 3799.5,1734 3840,1734 ; 3799.5,2098.5 3822,2098.5 ; 3799.5,2103 4141.5,2103 ; 3804,1491 3844.5,1491 ; 3804,2094 3826.5,2094 ; 3808.5,1729.5 3849,1729.5 ; 3808.5,2085 3831,2085 ; 3808.5,2089.5 3826.5,2089.5 ; 3813,1725 3853.5,1725 ; 3813,2080.5 3835.5,2080.5 ; 3817.5,1486.5 3844.5,1486.5 ; 3817.5,2071.5 3840,2071.5 ; 3817.5,2076 3835.5,2076 ; 3822,1720.5 3862.5,1720.5 ; 3822,2062.5 3844.5,2062.5 ; 3822,2067 3844.5,2067 ; 3826.5,2058 3849,2058 ; 3831,1482 3840,1482 ; 3831,1716 3871.5,1716 ; 3831,2049 3853.5,2049 ; 3831,2053.5 3849,2053.5 ; 3835.5,1972.5 4146,1972.5 ; 3835.5,1977 4146,1977 ; 3835.5,1981.5 4146,1981.5 ; 3835.5,1986 4146,1986 ; 3835.5,2040 3858,2040 ; 3835.5,2044.5 3858,2044.5 ; 3840,1711.5 3880.5,1711.5 ; 3840,2035.5 3862.5,2035.5 ; 3844.5,1707 3889.5,1707 ; 3844.5,2026.5 3867,2026.5 ; 3844.5,2031 3862.5,2031 ; 3844.5,2229 3867,2229 ; 3844.5,2233.5 3867,2233.5 ; 3849,2017.5 3871.5,2017.5 ; 3849,2022 3871.5,2022 ; 3849,2224.5 3871.5,2224.5 ; 3853.5,1702.5 3898.5,1702.5 ; 3853.5,2013 3876,2013 ; 3853.5,2215.5 3876,2215.5 ; 3853.5,2220 3871.5,2220 ; 3858,2004 3880.5,2004 ; 3858,2008.5 3876,2008.5 ; 3858,2211 3880.5,2211 ; 3862.5,1698 3912,1698 ; 3862.5,1999.5 3885,1999.5 ; 3862.5,2202 3885,2202 ; 3862.5,2206.5 3880.5,2206.5 ; 3867,1990.5 3889.5,1990.5 ; 3867,1995 3885,1995 ; 3867,2193 3889.5,2193 ; 3867,2197.5 3889.5,2197.5 ; 3871.5,1693.5 3921,1693.5 ; 3871.5,2188.5 3894,2188.5 ; 3876,2179.5 3898.5,2179.5 ; 3876,2184 3894,2184 ; 3880.5,1689 3930,1689 ; 3880.5,2170.5 3903,2170.5 ; 3880.5,2175 3903,2175 ; 3885,2166 3907.5,2166 ; 3889.5,2157 3912,2157 ; 3889.5,2161.5 3907.5,2161.5 ; 3894,1684.5 3943.5,1684.5 ; 3894,2148 3916.5,2148 ; 3894,2152.5 3916.5,2152.5 ; 3898.5,1459.5 3912,1459.5 ; 3898.5,1464 3912,1464 ; 3898.5,1468.5 3912,1468.5 ; 3898.5,1473 3912,1473 ; 3898.5,1477.5 3912,1477.5 ; 3898.5,1482 3916.5,1482 ; 3898.5,1486.5 3916.5,1486.5 ; 3898.5,1491 3916.5,1491 ; 3898.5,1495.5 3916.5,1495.5 ; 3898.5,1500 3916.5,1500 ; 3898.5,2143.5 3921,2143.5 ; 3903,1504.5 3921,1504.5 ; 3903,1509 3921,1509 ; 3903,1513.5 3921,1513.5 ; 3903,1518 3921,1518 ; 3903,1680 3957,1680 ; 3903,2134.5 3925.5,2134.5 ; 3903,2139 3921,2139 ; 3907.5,1522.5 3925.5,1522.5 ; 3907.5,1527 3925.5,1527 ; 3907.5,1531.5 3925.5,1531.5 ; 3907.5,1536 3930,1536 ; 3907.5,2130 3930,2130 ; 3912,1540.5 3930,1540.5 ; 3912,1545 3934.5,1545 ; 3912,1549.5 3934.5,1549.5 ; 3912,1675.5 3970.5,1675.5 ; 3912,2125.5 3930,2125.5 ; 3916.5,1554 3939,1554 ; 3916.5,1558.5 3939,1558.5 ; 3921,1563 3943.5,1563 ; 3921,1567.5 3948,1567.5 ; 3925.5,1572 3948,1572 ; 3925.5,1576.5 3952.5,1576.5 ; 3925.5,1671 3988.5,1671 ; 3925.5,2098.5 3948,2098.5 ; 3930,1581 3957,1581 ; 3930,2089.5 3952.5,2089.5 ; 3930,2094 3952.5,2094 ; 3934.5,1585.5 3961.5,1585.5 ; 3934.5,1590 3966,1590 ; 3934.5,1666.5 4006.5,1666.5 ; 3934.5,2085 3957,2085 ; 3939,1594.5 3970.5,1594.5 ; 3939,2076 3961.5,2076 ; 3939,2080.5 3957,2080.5 ; 3943.5,1599 3975,1599 ; 3943.5,2071.5 3966,2071.5 ; 3948,1603.5 3984,1603.5 ; 3948,1662 4029,1662 ; 3948,2062.5 3970.5,2062.5 ; 3948,2067 3966,2067 ; 3952.5,1608 3993,1608 ; 3952.5,2053.5 3975,2053.5 ; 3952.5,2058 3975,2058 ; 3957,1612.5 3997.5,1612.5 ; 3957,2049 3979.5,2049 ; 3961.5,1617 4011,1617 ; 3961.5,1657.5 4056,1657.5 ; 3961.5,2040 3984,2040 ; 3961.5,2044.5 3979.5,2044.5 ; 3966,2031 3988.5,2031 ; 3966,2035.5 3988.5,2035.5 ; 3970.5,1621.5 4020,1621.5 ; 3970.5,2026.5 3993,2026.5 ; 3970.5,2233.5 3993,2233.5 ; 3975,1626 4038,1626 ; 3975,2017.5 3997.5,2017.5 ; 3975,2022 3993,2022 ; 3975,2224.5 3997.5,2224.5 ; 3975,2229 3993,2229 ; 3979.5,1653 4258.5,1653 ; 3979.5,1815 4002,1815 ; 3979.5,1819.5 3997.5,1819.5 ; 3979.5,2008.5 4002,2008.5 ; 3979.5,2013 4002,2013 ; 3979.5,2220 4002,2220 ; 3984,1630.5 4060.5,1630.5 ; 3984,1806 4006.5,1806 ; 3984,1810.5 4002,1810.5 ; 3984,1824 3993,1824 ; 3984,2004 4006.5,2004 ; 3984,2211 4006.5,2211 ; 3984,2215.5 4002,2215.5 ; 3988.5,1797 4011,1797 ; 3988.5,1801.5 4006.5,1801.5 ; 3988.5,1995 4011,1995 ; 3988.5,1999.5 4006.5,1999.5 ; 3988.5,2202 4011,2202 ; 3988.5,2206.5 4011,2206.5 ; 3993,1635 4182,1635 ; 3993,1788 4015.5,1788 ; 3993,1792.5 4015.5,1792.5 ; 3993,1990.5 4015.5,1990.5 ; 3993,2197.5 4015.5,2197.5 ; 3997.5,1648.5 4258.5,1648.5 ; 3997.5,1783.5 4020,1783.5 ; 3997.5,2188.5 4020,2188.5 ; 3997.5,2193 4015.5,2193 ; 4002,1639.5 4263,1639.5 ; 4002,1774.5 4024.5,1774.5 ; 4002,1779 4020,1779 ; 4002,2179.5 4024.5,2179.5 ; 4002,2184 4024.5,2184 ; 4002,2265 4101,2265 ; 4002,2269.5 4101,2269.5 ; 4002,2274 4096.5,2274 ; 4002,2278.5 4092,2278.5 ; 4006.5,1765.5 4029,1765.5 ; 4006.5,1770 4029,1770 ; 4006.5,2175 4029,2175 ; 4006.5,2260.5 4105.5,2260.5 ; 4011,1644 4263,1644 ; 4011,1761 4033.5,1761 ; 4011,2166 4033.5,2166 ; 4011,2170.5 4029,2170.5 ; 4015.5,1752 4038,1752 ; 4015.5,1756.5 4033.5,1756.5 ; 4015.5,2161.5 4038,2161.5 ; 4020,1743 4042.5,1743 ; 4020,1747.5 4038,1747.5 ; 4020,2152.5 4042.5,2152.5 ; 4020,2157 4038,2157 ; 4024.5,1738.5 4047,1738.5 ; 4024.5,2143.5 4047,2143.5 ; 4024.5,2148 4047,2148 ; 4029,1729.5 4051.5,1729.5 ; 4029,1734 4047,1734 ; 4029,2139 4051.5,2139 ; 4033.5,1720.5 4056,1720.5 ; 4033.5,1725 4051.5,1725 ; 4033.5,2130 4056,2130 ; 4033.5,2134.5 4051.5,2134.5 ; 4038,1711.5 4060.5,1711.5 ; 4038,1716 4060.5,1716 ; 4038,2125.5 4060.5,2125.5 ; 4042.5,1707 4065,1707 ; 4047,1698 4069.5,1698 ; 4047,1702.5 4065,1702.5 ; 4051.5,1689 4074,1689 ; 4051.5,1693.5 4074,1693.5 ; 4051.5,2098.5 4074,2098.5 ; 4056,1684.5 4078.5,1684.5 ; 4056,2094 4078.5,2094 ; 4060.5,1675.5 4083,1675.5 ; 4060.5,1680 4078.5,1680 ; 4060.5,2085 4083,2085 ; 4060.5,2089.5 4078.5,2089.5 ; 4065,1666.5 4087.5,1666.5 ; 4065,1671 4083,1671 ; 4065,2080.5 4087.5,2080.5 ; 4069.5,1657.5 4092,1657.5 ; 4069.5,1662 4092,1662 ; 4069.5,2071.5 4092,2071.5 ; 4069.5,2076 4087.5,2076 ; 4074,2062.5 4096.5,2062.5 ; 4074,2067 4096.5,2067 ; 4078.5,2058 4101,2058 ; 4083,2049 4105.5,2049 ; 4083,2053.5 4101,2053.5 ; 4087.5,1630.5 4110,1630.5 ; 4087.5,2040 4110,2040 ; 4087.5,2044.5 4110,2044.5 ; 4087.5,2251.5 4110,2251.5 ; 4087.5,2256 4110,2256 ; 4092,1621.5 4114.5,1621.5 ; 4092,1626 4110,1626 ; 4092,2035.5 4114.5,2035.5 ; 4092,2247 4114.5,2247 ; 4096.5,1612.5 4119,1612.5 ; 4096.5,1617 4114.5,1617 ; 4096.5,2026.5 4119,2026.5 ; 4096.5,2031 4114.5,2031 ; 4096.5,2238 4119,2238 ; 4096.5,2242.5 4114.5,2242.5 ; 4101,1608 4123.5,1608 ; 4101,2017.5 4123.5,2017.5 ; 4101,2022 4123.5,2022 ; 4101,2229 4123.5,2229 ; 4101,2233.5 4123.5,2233.5 ; 4105.5,1599 4128,1599 ; 4105.5,1603.5 4123.5,1603.5 ; 4105.5,2013 4128,2013 ; 4105.5,2224.5 4128,2224.5 ; 4110,1590 4132.5,1590 ; 4110,1594.5 4128,1594.5 ; 4110,2004 4132.5,2004 ; 4110,2008.5 4128,2008.5 ; 4110,2215.5 4132.5,2215.5 ; 4110,2220 4128,2220 ; 4114.5,1581 4137,1581 ; 4114.5,1585.5 4137,1585.5 ; 4114.5,1999.5 4137,1999.5 ; 4114.5,2211 4137,2211 ; 4119,1576.5 4141.5,1576.5 ; 4119,1990.5 4141.5,1990.5 ; 4119,1995 4137,1995 ; 4119,2202 4141.5,2202 ; 4119,2206.5 4137,2206.5 ; 4123.5,1567.5 4146,1567.5 ; 4123.5,1572 4141.5,1572 ; 4123.5,2193 4146,2193 ; 4123.5,2197.5 4146,2197.5 ; 4128,1558.5 4150.5,1558.5 ; 4128,1563 4150.5,1563 ; 4128,2188.5 4150.5,2188.5 ; 4132.5,1554 4155,1554 ; 4132.5,2179.5 4155,2179.5 ; 4132.5,2184 4150.5,2184 ; 4137,1545 4159.5,1545 ; 4137,1549.5 4155,1549.5 ; 4137,2170.5 4159.5,2170.5 ; 4137,2175 4159.5,2175 ; 4141.5,1536 4164,1536 ; 4141.5,1540.5 4159.5,1540.5 ; 4141.5,2166 4164,2166 ; 4146,1531.5 4168.5,1531.5 ; 4146,2157 4168.5,2157 ; 4146,2161.5 4164,2161.5 ; 4150.5,1522.5 4173,1522.5 ; 4150.5,1527 4168.5,1527 ; 4150.5,2148 4173,2148 ; 4150.5,2152.5 4173,2152.5 ; 4155,1513.5 4177.5,1513.5 ; 4155,1518 4173,1518 ; 4155,1788 4177.5,1788 ; 4155,1792.5 4173,1792.5 ; 4155,1797 4173,1797 ; 4155,1801.5 4168.5,1801.5 ; 4155,2143.5 4177.5,2143.5 ; 4159.5,1504.5 4182,1504.5 ; 4159.5,1509 4182,1509 ; 4159.5,1779 4182,1779 ; 4159.5,1783.5 4182,1783.5 ; 4159.5,2134.5 4182,2134.5 ; 4159.5,2139 4177.5,2139 ; 4164,1500 4186.5,1500 ; 4164,1774.5 4186.5,1774.5 ; 4164,2130 4213.5,2130 ; 4168.5,1491 4191,1491 ; 4168.5,1495.5 4186.5,1495.5 ; 4168.5,1765.5 4191,1765.5 ; 4168.5,1770 4186.5,1770 ; 4168.5,2121 4240.5,2121 ; 4168.5,2125.5 4227,2125.5 ; 4173,1482 4195.5,1482 ; 4173,1486.5 4195.5,1486.5 ; 4173,1756.5 4195.5,1756.5 ; 4173,1761 4191,1761 ; 4173,2112 4195.5,2112 ; 4173,2116.5 4249.5,2116.5 ; 4177.5,1477.5 4200,1477.5 ; 4177.5,1747.5 4200,1747.5 ; 4177.5,1752 4200,1752 ; 4177.5,2107.5 4200,2107.5 ; 4182,1468.5 4200,1468.5 ; 4182,1473 4200,1473 ; 4182,1743 4204.5,1743 ; 4182,2098.5 4204.5,2098.5 ; 4182,2103 4200,2103 ; 4186.5,1464 4195.5,1464 ; 4186.5,1734 4209,1734 ; 4186.5,1738.5 4204.5,1738.5 ; 4186.5,2089.5 4209,2089.5 ; 4186.5,2094 4209,2094 ; 4191,1725 4213.5,1725 ; 4191,1729.5 4213.5,1729.5 ; 4191,2085 4213.5,2085 ; 4191,2134.5 4200,2134.5 ; 4195.5,1720.5 4218,1720.5 ; 4195.5,1950 4290,1950 ; 4195.5,1954.5 4290,1954.5 ; 4195.5,1959 4290,1959 ; 4195.5,1963.5 4285.5,1963.5 ; 4195.5,2076 4218,2076 ; 4195.5,2080.5 4213.5,2080.5 ; 4200,1711.5 4222.5,1711.5 ; 4200,1716 4218,1716 ; 4200,1945.5 4290,1945.5 ; 4200,2071.5 4222.5,2071.5 ; 4204.5,1702.5 4227,1702.5 ; 4204.5,1707 4222.5,1707 ; 4204.5,2062.5 4227,2062.5 ; 4204.5,2067 4222.5,2067 ; 4204.5,2112 4263,2112 ; 4209,1698 4231.5,1698 ; 4209,2053.5 4231.5,2053.5 ; 4209,2058 4231.5,2058 ; 4213.5,1689 4236,1689 ; 4213.5,1693.5 4231.5,1693.5 ; 4213.5,2049 4236,2049 ; 4218,1680 4240.5,1680 ; 4218,1684.5 4236,1684.5 ; 4218,2040 4240.5,2040 ; 4218,2044.5 4236,2044.5 ; 4218,2107.5 4276.5,2107.5 ; 4222.5,1671 4245,1671 ; 4222.5,1675.5 4245,1675.5 ; 4222.5,2031 4245,2031 ; 4222.5,2035.5 4245,2035.5 ; 4227,1666.5 4249.5,1666.5 ; 4227,2026.5 4249.5,2026.5 ; 4231.5,1657.5 4254,1657.5 ; 4231.5,1662 4249.5,1662 ; 4231.5,2017.5 4254,2017.5 ; 4231.5,2022 4249.5,2022 ; 4231.5,2103 4285.5,2103 ; 4236,2008.5 4258.5,2008.5 ; 4236,2013 4258.5,2013 ; 4240.5,2004 4263,2004 ; 4245,1635 4267.5,1635 ; 4245,1995 4267.5,1995 ; 4245,1999.5 4263,1999.5 ; 4245,2098.5 4285.5,2098.5 ; 4249.5,1626 4272,1626 ; 4249.5,1630.5 4267.5,1630.5 ; 4249.5,1990.5 4272,1990.5 ; 4254,1621.5 4276.5,1621.5 ; 4254,1981.5 4276.5,1981.5 ; 4254,1986 4272,1986 ; 4258.5,1612.5 4281,1612.5 ; 4258.5,1617 4276.5,1617 ; 4258.5,1972.5 4281,1972.5 ; 4258.5,1977 4281,1977 ; 4258.5,2094 4285.5,2094 ; 4263,1603.5 4285.5,1603.5 ; 4263,1608 4281,1608 ; 4263,1968 4285.5,1968 ; 4267.5,1594.5 4290,1594.5 ; 4267.5,1599 4290,1599 ; 4267.5,2089.5 4285.5,2089.5 ; 4272,1590 4294.5,1590 ; 4276.5,1581 4299,1581 ; 4276.5,1585.5 4294.5,1585.5 ; 4281,1572 4303.5,1572 ; 4281,1576.5 4303.5,1576.5 ; 4285.5,1567.5 4308,1567.5 ; 4290,1558.5 4312.5,1558.5 ; 4290,1563 4308,1563 ; 4294.5,1549.5 4317,1549.5 ; 4294.5,1554 4312.5,1554 ; 4299,1545 4321.5,1545 ; 4303.5,1536 4326,1536 ; 4303.5,1540.5 4321.5,1540.5 ; 4308,1527 4330.5,1527 ; 4308,1531.5 4326,1531.5 ; 4312.5,1518 4335,1518 ; 4312.5,1522.5 4335,1522.5 ; 4317,1513.5 4339.5,1513.5 ; 4321.5,1504.5 4344,1504.5 ; 4321.5,1509 4339.5,1509 ; 4326,1495.5 4348.5,1495.5 ; 4326,1500 4348.5,1500 ; 4326,2085 4348.5,2085 ; 4326,2089.5 4344,2089.5 ; 4326,2094 4344,2094 ; 4326,2098.5 4339.5,2098.5 ; 4326,2103 4339.5,2103 ; 4326,2107.5 4344,2107.5 ; 4326,2112 4362,2112 ; 4326,2116.5 4632,2116.5 ; 4326,2121 4632,2121 ; 4330.5,1491 4348.5,1491 ; 4330.5,2080.5 4353,2080.5 ; 4330.5,2125.5 4627.5,2125.5